# EAGLE board kitt_db01 (EAGLE 7.6.0)
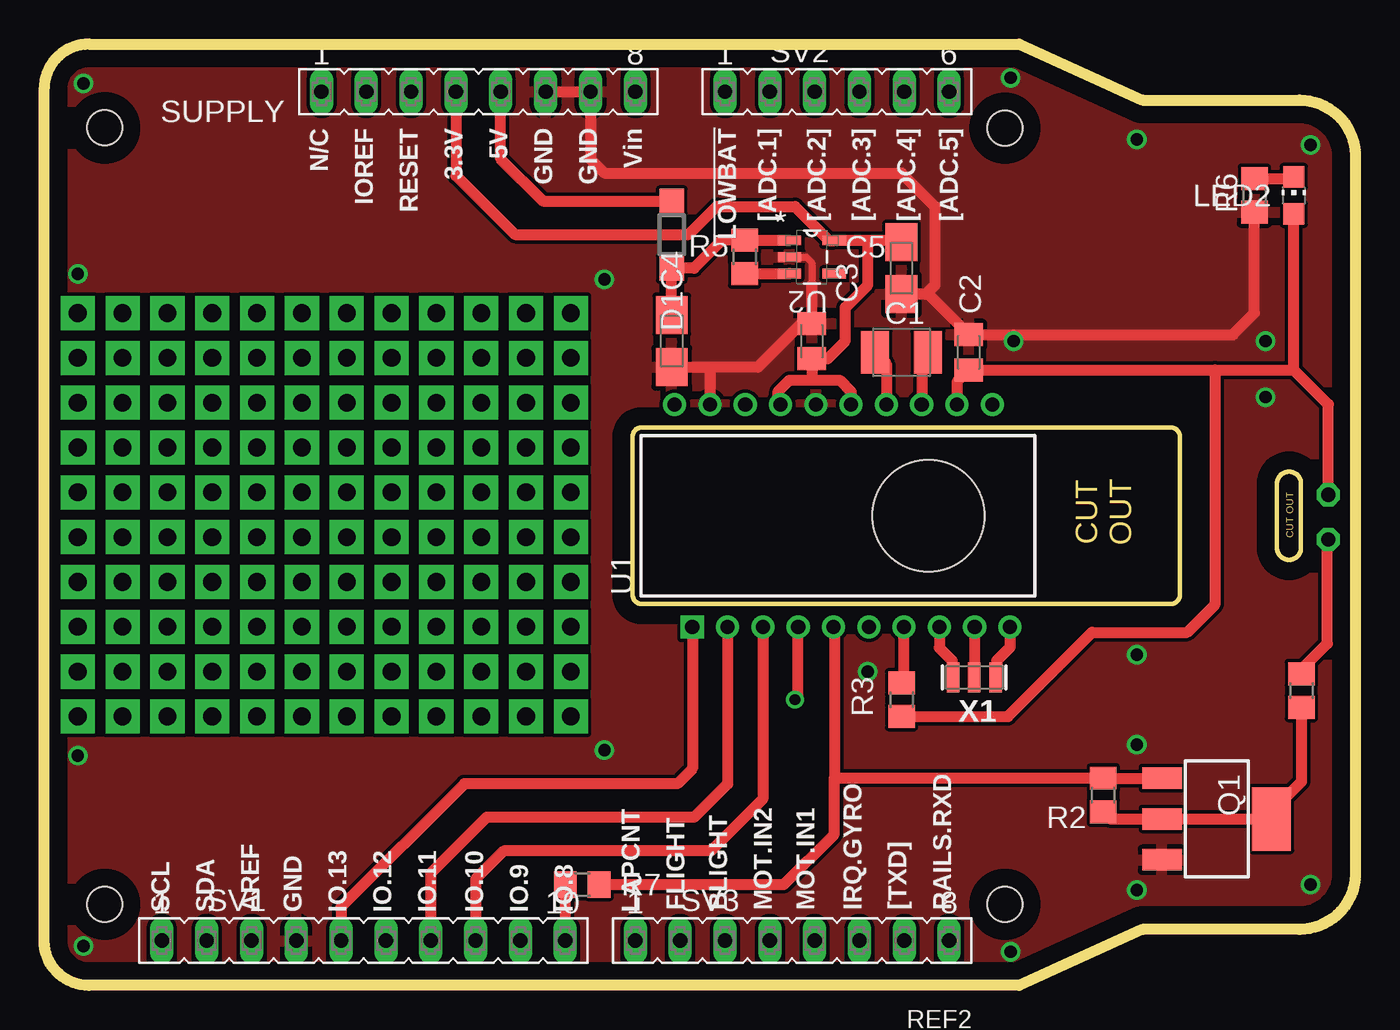
[diagram p0: board, top side]
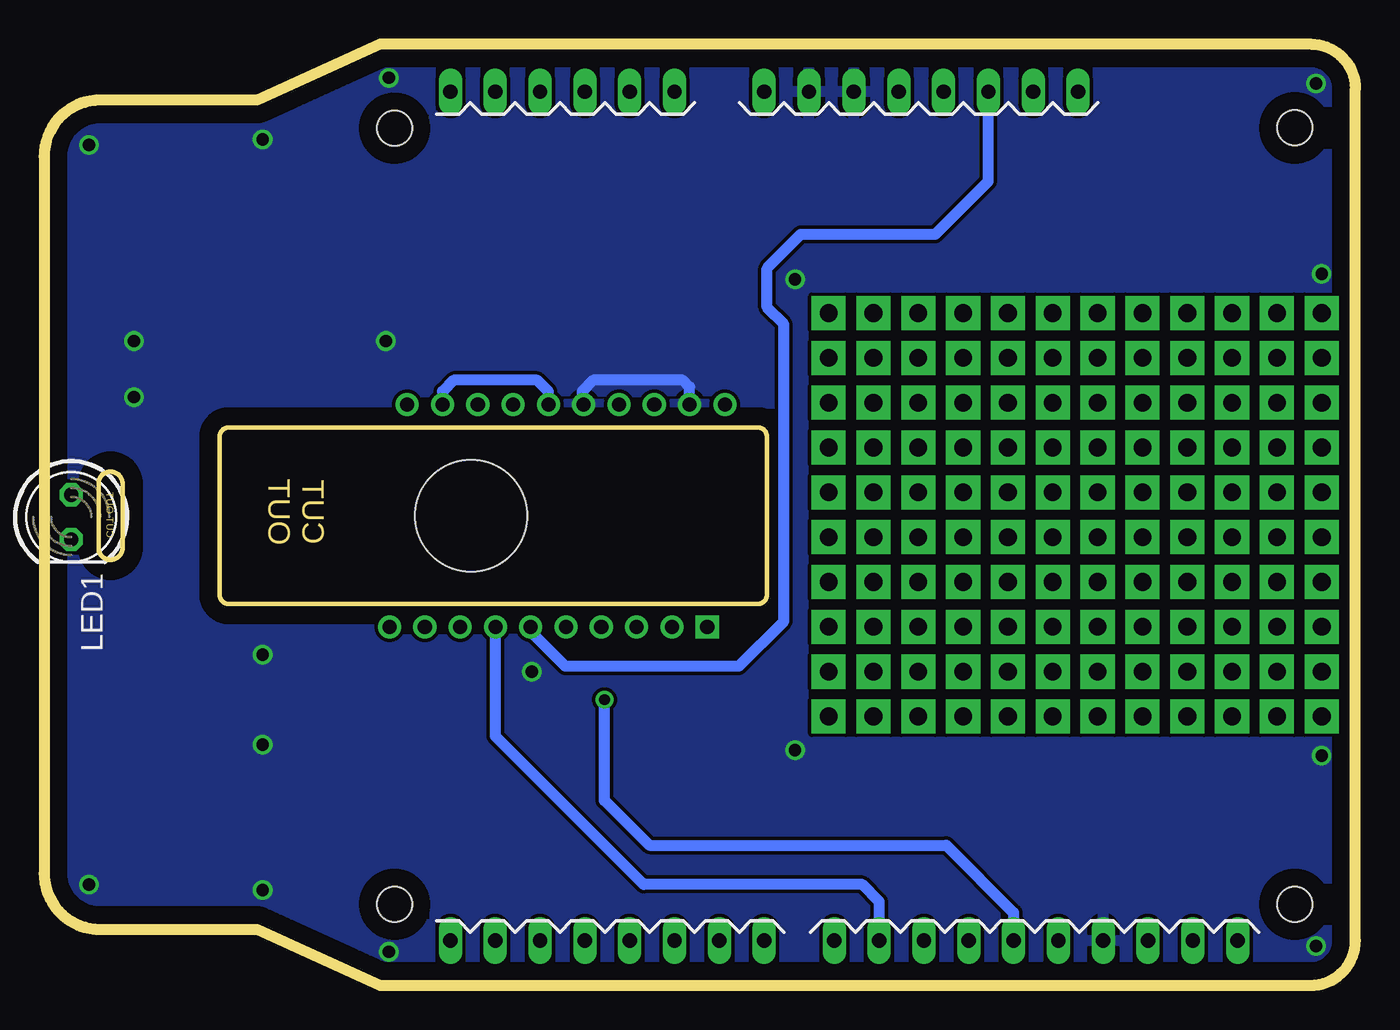
[diagram p1: board, bottom side, seen from below]

Size 74.29 x 53.34 mm. Coordinates in mm from the lower left corner, seen from the top.
Outline: 33.35,31.12 33.35,22.12 arc90 33.85,21.62 63.85,21.62 arc90 64.35,22.12 64.35,31.12 arc90 63.85,31.62 33.85,31.62 arc90 33.35,31.12
Outline: 69.85,28.43 arc-90 70.53,29.12 arc-90 71.21,28.43 71.21,24.8 arc-90 70.53,24.12 arc-90 69.85,24.8 69.85,28.43
Outline: 2.54,53.34 arc90 0,50.8 0,2.54 arc90 2.54,0 55.25,0 62.23,3.18 71.12,3.18 arc90 74.29,6.35 74.29,46.99 arc90 71.12,50.16 62.23,50.16 55.25,53.34 2.54,53.34
Copper layers (1*16): Top 0.035mm / dielectric 1.5mm / Bottom 0.035mm
Design rules "default": minimum track width 10mil, minimum drill 24mil, track to track 8mil, track to pad 8mil, pad to pad 8mil, via to via 8mil, smd to smd 8mil, copper to edge 40mil, drill to drill 8mil, minimum pad ring 10mil, minimum via ring 8mil, stop-mask expansion 4mil, vias tented up to drill 0mil, thermal gap 10mil
Holes 2 mm at 3.43,48.6 54.43,48.57 54.43,4.59 3.43,4.59
tRestrict: area 33.7,21.9 to 64.1,31.4
bRestrict: area 33.7,21.9 to 64.1,31.4

## Footprints (pad centres in the part's own frame; a part is rotated, then mirrored left to right if it is on the bottom)
SMC_B = smd 1.6 x 2.4: + -1.5,0; - 1.5,0
C0805K = smd 1.3 x 1.6: 1 -1,0; 2 1,0
A/3216-18W = smd 2.15 x 1.8: + 1.475,0; - -1.475,0
SOD123 = smd 1.4 x 1.4: A 1.9,0; C -1.9,0
LED5MM = drill 0.813 octagon: A -1.27,0; K 1.27,0
CHIP-LED0805 = smd 1.2 x 1.2: A 0,-1.05; C 0,1.05
SOT223 = smd 1.219 x 2.235: 1 -2.311,-3.099; 2 0,-3.099; 3 2.311,-3.099 | smd 3.6 x 2.2: 4 0,3.099
R0805 = smd 1.3 x 1.5: 1 -0.95,0; 2 0.95,0
FE08 = drill 0.813 long: 1 -8.89,0; 2 -6.35,0; 3 -3.81,0; 4 -1.27,0; 5 1.27,0; 6 3.81,0; 7 6.35,0; 8 8.89,0
FE10 = drill 0.813 long: 1 -11.43,0; 2 -8.89,0; 3 -6.35,0; 4 -3.81,0; 5 -1.27,0; 6 1.27,0; 7 3.81,0; 8 6.35,0; 9 8.89,0; 10 11.43,0
FE06 = drill 0.813 long: 1 -6.35,0; 2 -3.81,0; 3 -1.27,0; 4 1.27,0; 5 3.81,0; 6 6.35,0
ADNS-3080 = drill 0.8 square: 1 -8.126,-6.3 | drill 0.8: 2 -6.126,-6.3; 3 -4.126,-6.3; 4 -2.126,-6.3; 5 -0.126,-6.3; 6 1.874,-6.3; 7 3.874,-6.3; 8 5.874,-6.3; 9 7.874,-6.3; 10 9.874,-6.3; 11 8.874,6.3; 12 6.874,6.3; 13 4.874,6.3; 14 2.874,6.3; 15 0.874,6.3; 16 -1.126,6.3; 17 -3.126,6.3; 18 -5.126,6.3; 19 -7.126,6.3; 20 -9.126,6.3 | hole 6.35: 5.254,0
SOT95P280X130-5N = smd 1.321 x 0.559: 1 -1.27,0.94; 2 -1.27,0; 3 -1.27,-0.94; 4 1.27,-0.94; 5 1.27,0.94
RESON-SMD = smd 0.7 x 1.7: 1 -1.2,0; 2 0,0; 3 1.2,0

## Placement (x,y rotation side)
C1  [SMC_B]  48.58,35.88 180 top
C2  100nF  [C0805K]  52.39,35.88 90 top
C3  100nF  [C0805K]  43.5,36.51 90 top
C4  1uF  [A/3216-18W]  35.56,36.51 90 top
C5  1uF  [A/3216-18W]  48.58,40.64 90 top
D1  MBR0520LT  [SOD123]  35.56,42.55 90 top
LED1  [LED5MM]  72.76,26.54 270 bottom
LED2  POWER  [CHIP-LED0805]  70.8,44.77 0 top
Q1  [MMBF170]  [SOT223]  66.44,9.44 270 top
R1  180R  [R0805]  71.23,16.71 90 top
R2  [0R]  [R0805]  60.01,10.8 90 top
R3  [PPR]  [R0805]  48.58,16.19 90 top
R5  [0R]  [R0805]  39.69,41.27 270 top
R6  [PPR]  [R0805]  68.58,44.77 270 top
R7  [0R]  [R0805]  30.48,5.72 180 top
REF1  REF.KITT-DB01  [REF_KITT-DB01]  38.26,26.67 0 top
REF2  REF_GC-BBV2.0  [REF_GHOSTCAR]  28.42,25.88 180 top
SUPPLY  [FE08]  24.61,50.64 0 top
SV1  [FE10]  18.1,2.54 0 top
SV2  [FE06]  44.93,50.64 0 top
SV3  [FE08]  42.39,2.54 0 top
U1  ADNS-3080  [ADNS-3080]  44.85,26.62 0 top
U2  MIC5205-3.3YM5TR  [SOT95P280X130-5N]  43.5,41.27 0 top
U$1  [A3L-LOC]  -107,-109.54 0 top  (outside the outline)
X1  RESON  [RESON-SMD]  52.7,17.46 180 top

## Library data of the parts
C1-C5 R1-R3 R5-R7 = rcl
D1 = diode
LED1 LED2 = led
Q1 = transistor-power
REF1 = kitt.refs
REF2 = kitt.con
SUPPLY SV1-SV3 = con-lsta; OC_FARNELL: unknown; OC_NEWARK: unknown
U1 = Ai_IC
U2 = kitt.ic; AVAILABILITY: Good; DESCRIPTION: MIC5205 Series 3.3 V Fixed Output 150 mA Low-Noise LDO Regulator - SOT-23-5; MF: Microchip; MP: MIC5205-3.3YM5-TR; PACKAGE: SOT-23-5 Microchip; PRICE: 0.36 USD
U$1 = frames
X1 = Ai_Passives

## Nets
!CS: SV1.5 U1.1
!LEDCTRL: R7.2 SV1.10
!PD: R3.2 SV1.9 U1.7
+3V3: C2.1 C3.1 C5.+ LED1.A LED2.A R3.1 SUPPLY.4 U1.12 U1.15 U1.17 U2.5
+5V: D1.A SUPPLY.5
GND: C2.2 C3.2 C4.- C5.- Q1.3 R6.2 SUPPLY.6 SUPPLY.7 SV1.4 U1.16 U1.19 U2.2
MISO: SV1.7 U1.2
MOSI: SV1.6 U1.4
N$1: U1.9 X1.2
N$2: U1.8 X1.3
N$3: U1.10 X1.1
N$4: Q1.1 R2.2 R7.1 U1.5
N$5: C1.+ U1.13
N$6: C1.- U1.14
N$7: Q1.2 Q1.4 R1.1 R2.1
N$8: LED1.K R1.2
N$9: C4.+ D1.C R5.1 U2.1
N$10: R5.2 U2.3
N$11: LED2.C R6.1
RST: SUPPLY.3 U1.6
SCLK: SV1.8 U1.3

## Tracks (layer width: path | path; a pad name or v marks a point on that pad's centre or on a via)
!CS
  Top 0.61: U1.1 36.72,12.28 35.88,11.43 23.81,11.43 16.83,4.45 SV1.5
!LEDCTRL
  Top 0.61: R7.2 SV1.10
!PD
  Top 0.61: R3.2 48.72,17.29 U1.7
  Bottom 0.61: U1.7 48.72,14.12 40.32,5.72 27.94,5.72 26.99,4.76 SV1.9
+3V3
  Top 0.61: C5.+ 48.8,42.21 46.67,42.21 | 46.67,42.21 U2.5 44.46,42.21 42.55,44.13 38.1,44.13 36.51,42.55 26.67,42.55 23.34,45.88 SUPPLY.4 | 46.67,42.21 46.67,39.69 45.4,38.42 45.4,36.51 44.4,35.51 C3.1 43.5,34.29 | U1.12 51.72,34.21 C2.1 66.36,34.88 | U1.17 41.59,33.05 41.59,33.66 42.23,34.29 43.5,34.29 | 43.5,34.29 45.09,34.29 45.72,33.65 U1.15 | 66.36,34.88 70.8,34.88 | 70.8,34.88 LED2.A | LED1.A 72.76,32.92 70.8,34.88 | R3.1 54.61,15.24 59.37,20 64.77,20 66.36,21.59 66.36,34.88
  Bottom 0.61: U1.15 45.72,33.66 46.36,34.29 51.09,34.29 51.72,33.66 U1.12
+5V
  Top 0.61: D1.A 28.26,44.45 25.88,46.83 SUPPLY.5
GND  (via drill 0.7)
  Top 0.406: 43.5,39.69 43.5,40.96 43.18,41.27 U2.2
  Top 0.61: 43.5,39.69 C3.2 42.91,37.51 40.44,35.04 37.72,35.04 | R6.2 68.58,38.1 67.36,36.88 C2.2 50.1,39.16 49.96,39.16 | C4.- 37.72,35.04 | 37.72,35.04 U1.19 | SUPPLY.6 SUPPLY.7 30.96,46.83 31.75,46.04 48.58,46.04 50.48,44.13 50.48,39.69 49.96,39.16 | 49.96,39.16 C5.-
  Bottom 0.61: U1.19 37.72,33.91 38.1,34.29 43.18,34.29 43.82,33.66 43.82,33.01 U1.16
  other vias: 2.22,51.12 1.9,40.32 31.75,40.01 31.75,13.34 1.9,13.02 2.22,2.22 54.77,1.91 61.91,5.4 71.75,5.72 71.75,47.63 61.91,47.94 54.77,51.43 61.91,13.65 69.22,36.51 69.22,33.34 54.93,36.51 61.91,18.73 46.67,17.78
  pour Top: 2.54,52.71 arc90 0.63,50.8 0.63,2.54 arc90 2.54,0.64 55.25,0.64 62.23,3.81 71.12,3.81 arc90 73.66,6.35 73.66,47.31 arc90 71.44,49.53 62.23,49.53 55.25,52.71
  pour Bottom: 2.54,52.71 arc90 0.63,50.8 0.63,2.54 arc90 2.54,0.64 55.25,0.64 62.23,3.81 71.12,3.81 arc90 73.66,6.35 73.66,47.31 arc90 71.44,49.53 62.23,49.53 55.25,52.71
MISO
  Top 0.61: U1.2 38.72,11.42 36.83,9.52 25.08,9.52 21.91,6.35 SV1.7
MOSI  (via drill 0.6)
  Top 0.61: U1.4 42.72,16.37 v42.55,16.19
  Bottom 0.61: v42.55,16.19 42.55,10.48 40.01,7.94 23.18,7.94 19.37,4.13 SV1.6
N$1
  Top 0.61: U1.9 52.7,20.3 X1.2
N$2
  Top 0.61: U1.8 50.72,19.13 51.44,18.41 51.44,17.53 X1.3
N$3
  Top 0.61: U1.10 54.72,19.16 53.98,18.41 53.98,17.53 X1.1
N$4
  Top 0.61: U1.5 44.77,20.27 44.77,11.75 | R7.1 41.91,5.72 44.77,8.57 44.77,11.75 | Q1.1 R2.2 44.77,11.75
N$5
  Top 0.61: C1.+ 49.72,35.52 U1.13
N$6
  Top 0.61: C1.- 47.72,35.23 U1.14
N$7
  Top 0.61: R2.1 60.42,9.44 Q1.2 Q1.4 69.85,9.75 69.85,10.16 71.23,11.55 R1.1
N$8
  Top 0.61: R1.2 71.23,17.9 72.71,19.37 72.71,24.9 LED1.K
N$9
  Top 0.61: U2.1 R5.1 38.41,42.23 36.83,40.64 D1.C C4.+
N$10
  Top 0.61: R5.2 U2.3
N$11
  Top 0.61: R6.1 70.7,45.72 LED2.C
N$14  (via drill 1 pad 1.93)
  other vias: 6.98,38.1
N$15  (via drill 1 pad 1.93)
  other vias: 9.52,38.1
N$16  (via drill 1 pad 1.93)
  other vias: 12.06,38.1
N$17  (via drill 1 pad 1.93)
  other vias: 14.61,38.1
N$18  (via drill 1 pad 1.93)
  other vias: 17.14,38.1
N$19  (via drill 1 pad 1.93)
  other vias: 19.69,38.1
N$20  (via drill 1 pad 1.93)
  other vias: 22.23,38.1
N$21  (via drill 1 pad 1.93)
  other vias: 24.77,38.1
N$22  (via drill 1 pad 1.93)
  other vias: 27.3,38.1
N$23  (via drill 1 pad 1.93)
  other vias: 29.84,38.1
N$24  (via drill 1 pad 1.93)
  other vias: 6.98,35.56
N$25  (via drill 1 pad 1.93)
  other vias: 9.52,35.56
N$26  (via drill 1 pad 1.93)
  other vias: 12.06,35.56
N$27  (via drill 1 pad 1.93)
  other vias: 14.61,35.56
N$28  (via drill 1 pad 1.93)
  other vias: 17.14,35.56
N$29  (via drill 1 pad 1.93)
  other vias: 19.69,35.56
N$30  (via drill 1 pad 1.93)
  other vias: 22.23,35.56
N$31  (via drill 1 pad 1.93)
  other vias: 24.77,35.56
N$32  (via drill 1 pad 1.93)
  other vias: 27.3,35.56
N$33  (via drill 1 pad 1.93)
  other vias: 29.84,35.56
N$34  (via drill 1 pad 1.93)
  other vias: 6.98,33.02
N$35  (via drill 1 pad 1.93)
  other vias: 9.52,33.02
N$36  (via drill 1 pad 1.93)
  other vias: 12.06,33.02
N$37  (via drill 1 pad 1.93)
  other vias: 14.61,33.02
N$38  (via drill 1 pad 1.93)
  other vias: 17.14,33.02
N$39  (via drill 1 pad 1.93)
  other vias: 19.69,33.02
N$40  (via drill 1 pad 1.93)
  other vias: 22.23,33.02
N$41  (via drill 1 pad 1.93)
  other vias: 24.77,33.02
N$42  (via drill 1 pad 1.93)
  other vias: 27.3,33.02
N$43  (via drill 1 pad 1.93)
  other vias: 29.84,33.02
N$44  (via drill 1 pad 1.93)
  other vias: 6.98,30.48
N$45  (via drill 1 pad 1.93)
  other vias: 9.52,30.48
N$46  (via drill 1 pad 1.93)
  other vias: 12.06,30.48
N$47  (via drill 1 pad 1.93)
  other vias: 14.61,30.48
N$48  (via drill 1 pad 1.93)
  other vias: 17.14,30.48
N$49  (via drill 1 pad 1.93)
  other vias: 19.69,30.48
N$50  (via drill 1 pad 1.93)
  other vias: 22.23,30.48
N$51  (via drill 1 pad 1.93)
  other vias: 24.77,30.48
N$52  (via drill 1 pad 1.93)
  other vias: 27.3,30.48
N$53  (via drill 1 pad 1.93)
  other vias: 29.84,30.48
N$54  (via drill 1 pad 1.93)
  other vias: 6.98,27.94
N$55  (via drill 1 pad 1.93)
  other vias: 9.52,27.94
N$56  (via drill 1 pad 1.93)
  other vias: 12.06,27.94
N$57  (via drill 1 pad 1.93)
  other vias: 14.61,27.94
N$58  (via drill 1 pad 1.93)
  other vias: 17.14,27.94
N$59  (via drill 1 pad 1.93)
  other vias: 19.69,27.94
N$60  (via drill 1 pad 1.93)
  other vias: 22.23,27.94
N$61  (via drill 1 pad 1.93)
  other vias: 24.77,27.94
N$62  (via drill 1 pad 1.93)
  other vias: 27.3,27.94
N$63  (via drill 1 pad 1.93)
  other vias: 29.84,27.94
N$64  (via drill 1 pad 1.93)
  other vias: 6.98,25.4
N$65  (via drill 1 pad 1.93)
  other vias: 9.52,25.4
N$66  (via drill 1 pad 1.93)
  other vias: 12.06,25.4
N$67  (via drill 1 pad 1.93)
  other vias: 14.61,25.4
N$68  (via drill 1 pad 1.93)
  other vias: 17.14,25.4
N$69  (via drill 1 pad 1.93)
  other vias: 19.69,25.4
N$70  (via drill 1 pad 1.93)
  other vias: 22.23,25.4
N$71  (via drill 1 pad 1.93)
  other vias: 24.77,25.4
N$72  (via drill 1 pad 1.93)
  other vias: 27.3,25.4
N$73  (via drill 1 pad 1.93)
  other vias: 29.84,25.4
N$74  (via drill 1 pad 1.93)
  other vias: 6.98,22.86
N$75  (via drill 1 pad 1.93)
  other vias: 9.52,22.86
N$76  (via drill 1 pad 1.93)
  other vias: 12.06,22.86
N$77  (via drill 1 pad 1.93)
  other vias: 14.61,22.86
N$78  (via drill 1 pad 1.93)
  other vias: 17.14,22.86
N$79  (via drill 1 pad 1.93)
  other vias: 19.69,22.86
N$80  (via drill 1 pad 1.93)
  other vias: 22.23,22.86
N$81  (via drill 1 pad 1.93)
  other vias: 24.77,22.86
N$82  (via drill 1 pad 1.93)
  other vias: 27.3,22.86
N$83  (via drill 1 pad 1.93)
  other vias: 29.84,22.86
N$84  (via drill 1 pad 1.93)
  other vias: 6.98,20.32
N$85  (via drill 1 pad 1.93)
  other vias: 9.52,20.32
N$86  (via drill 1 pad 1.93)
  other vias: 12.06,20.32
N$87  (via drill 1 pad 1.93)
  other vias: 14.61,20.32
N$88  (via drill 1 pad 1.93)
  other vias: 17.14,20.32
N$89  (via drill 1 pad 1.93)
  other vias: 19.69,20.32
N$90  (via drill 1 pad 1.93)
  other vias: 22.23,20.32
N$91  (via drill 1 pad 1.93)
  other vias: 24.77,20.32
N$92  (via drill 1 pad 1.93)
  other vias: 27.3,20.32
N$93  (via drill 1 pad 1.93)
  other vias: 29.84,20.32
N$94  (via drill 1 pad 1.93)
  other vias: 6.98,17.78
N$95  (via drill 1 pad 1.93)
  other vias: 9.52,17.78
N$96  (via drill 1 pad 1.93)
  other vias: 12.06,17.78
N$97  (via drill 1 pad 1.93)
  other vias: 14.61,17.78
N$98  (via drill 1 pad 1.93)
  other vias: 17.14,17.78
N$99  (via drill 1 pad 1.93)
  other vias: 19.69,17.78
N$100  (via drill 1 pad 1.93)
  other vias: 22.23,17.78
N$101  (via drill 1 pad 1.93)
  other vias: 24.77,17.78
N$102  (via drill 1 pad 1.93)
  other vias: 27.3,17.78
N$103  (via drill 1 pad 1.93)
  other vias: 29.84,17.78
N$104  (via drill 1 pad 1.93)
  other vias: 6.98,15.24
N$105  (via drill 1 pad 1.93)
  other vias: 9.52,15.24
N$106  (via drill 1 pad 1.93)
  other vias: 12.06,15.24
N$107  (via drill 1 pad 1.93)
  other vias: 14.61,15.24
N$108  (via drill 1 pad 1.93)
  other vias: 17.14,15.24
N$109  (via drill 1 pad 1.93)
  other vias: 19.69,15.24
N$110  (via drill 1 pad 1.93)
  other vias: 22.23,15.24
N$111  (via drill 1 pad 1.93)
  other vias: 24.77,15.24
N$112  (via drill 1 pad 1.93)
  other vias: 27.3,15.24
N$113  (via drill 1 pad 1.93)
  other vias: 29.84,15.24
N$114  (via drill 1 pad 1.93)
  other vias: 1.9,38.1
N$115  (via drill 1 pad 1.93)
  other vias: 4.44,38.1
N$116  (via drill 1 pad 1.93)
  other vias: 1.9,35.56
N$117  (via drill 1 pad 1.93)
  other vias: 4.44,35.56
N$118  (via drill 1 pad 1.93)
  other vias: 1.9,33.02
N$119  (via drill 1 pad 1.93)
  other vias: 4.44,33.02
N$120  (via drill 1 pad 1.93)
  other vias: 1.9,30.48
N$121  (via drill 1 pad 1.93)
  other vias: 4.44,30.48
N$122  (via drill 1 pad 1.93)
  other vias: 1.9,27.94
N$123  (via drill 1 pad 1.93)
  other vias: 4.44,27.94
N$124  (via drill 1 pad 1.93)
  other vias: 1.9,25.4
N$125  (via drill 1 pad 1.93)
  other vias: 4.44,25.4
N$126  (via drill 1 pad 1.93)
  other vias: 1.9,22.86
N$127  (via drill 1 pad 1.93)
  other vias: 4.44,22.86
N$128  (via drill 1 pad 1.93)
  other vias: 1.9,20.32
N$129  (via drill 1 pad 1.93)
  other vias: 4.44,20.32
N$130  (via drill 1 pad 1.93)
  other vias: 1.9,17.78
N$131  (via drill 1 pad 1.93)
  other vias: 4.44,17.78
N$132  (via drill 1 pad 1.93)
  other vias: 1.9,15.24
N$133  (via drill 1 pad 1.93)
  other vias: 4.44,15.24
RST
  Bottom 0.61: U1.6 46.72,20.05 44.77,18.1 34.92,18.1 32.38,20.64 32.38,37.46 33.34,38.42 33.34,40.64 31.43,42.55 23.81,42.55 20.8,45.56 SUPPLY.3
SCLK
  Top 0.61: U1.3 40.72,10.56 37.78,7.62 26.03,7.62 24.45,6.03 SV1.8

## Text on the board
Dimension: CUT / OUT | CUT OUT
tDocu: The Prototyping Area is here because: / - it enables quick bodgejobs / - it uses up real estate which would be / wasted otherwise